# EAGLE board wiseboard3 (EAGLE 8.2.2)

Size 42 x 42 mm. Coordinates in mm from the lower left corner, seen from the top.
Outline: 42,5 42,37 arc90 37,42 5,42 arc90 0,37 0,5 arc90 5,0 37,0 arc90 42,5
Copper layers (1*16): Top 0.035mm / dielectric 1.5mm / Bottom 0.035mm
Design rules "default": minimum track width 6mil, minimum drill 0.35mm, track to track 6mil, track to pad 6mil, pad to pad 6mil, via to via 6mil, smd to smd 6mil, copper to edge 40mil, drill to drill 6mil, minimum pad ring 10mil, minimum via ring 8mil, stop-mask expansion 4mil, vias tented up to drill 0mil, thermal gap 10mil

## Footprints (pad centres in the part's own frame; a part is rotated, then mirrored left to right if it is on the bottom)
587-2103-1-ND = smd 1.5 x 4: P$1 -2.55,0; P$2 2.55,0
CHIP-LED0805 = smd 1.2 x 1.2: A 0,-1.05; C 0,1.05
C0805 = smd 1.3 x 1.5: 1 -0.95,0; 2 0.95,0
SOD-123 = smd 1.2 x 0.7: A 1.85,0; C -1.85,0
DO214AA = smd 1.8 x 2.2: A 2.55,0; C -2.55,0
SOP50P490X110-10N = smd 1.397 x 0.279: 1 -2.184,0.991; 2 -2.184,0.508; 3 -2.184,0; 4 -2.184,-0.508; 5 -2.184,-0.991; 6 2.184,-0.991; 7 2.184,-0.508; 8 2.184,0; 9 2.184,0.508; 10 2.184,0.991
SO08 = smd 0.6 x 2.2: 1 -1.905,-2.6; 2 -0.635,-2.6; 3 0.635,-2.6; 4 1.905,-2.6; 5 1.905,2.6; 6 0.635,2.6; 7 -0.635,2.6; 8 -1.905,2.6
SO8 = smd 0.6 x 2.2: 1 -1.905,-2.6; 2 -0.635,-2.6; 3 0.635,-2.6; 4 1.905,-2.6; 5 1.905,2.6; 6 0.635,2.6; 7 -0.635,2.6; 8 -1.905,2.6
SOT95P280X145-5N = smd 1.1 x 0.6: 1 -1.3,0.95; 2 -1.3,0; 3 -1.3,-0.95; 4 1.3,-0.95; 5 1.3,0.95
DQC10_P84X2P4 = smd 0.66 x 0.305: 1 -1.029,1; 2 -1.029,0.5; 3 -1.029,0; 4 -1.029,-0.5; 5 -1.029,-1; 6 1.029,-1; 7 1.029,-0.5; 8 1.029,0; 9 1.029,0.5; 10 1.029,1 | smd 0.94 x 2.515: 11 0,0
EDGE_CON_2 = smd 1.016 x 3.048: 1 1.27,1.524; 2 -1.27,1.524
EDGE_CON_4 = smd 1.016 x 3.048: 1 2.54,0.254; 2 0,0.254; 3 -5.08,0.254; 4 -2.54,0.254
SOT23 = smd 1 x 1.4: 1 -0.95,-1.306; 2 0.95,-1.306; 3 0,1.306
R0805 = smd 1.3 x 1.5: 1 -0.95,0; 2 0.95,0
KMR2 = smd 1 x 1: 1 2,0.8; 2 2,-0.8; 3 -2,0.8; 4 -2,-0.8
ESP-WROOM-03 = smd 0.9 x 1.5: 1 7.7,9; 2 6.43,9; 3 5.16,9; 4 3.89,9; 5 2.62,9; 6 1.35,9; 7 0.08,9; 8 -1.19,9; 9 -2.46,9; 10 -3.73,9; 11 -5,9; 12 -6.27,9; 13 -7.54,9; 14 -8.81,9; 25 -8.81,-9; 26 -7.54,-9; 27 -6.27,-9; 28 -5,-9; 29 -3.73,-9; 30 -2.46,-9; 31 -1.19,-9; 32 0.08,-9; 33 1.35,-9; 34 2.62,-9; 35 3.89,-9; 36 5.16,-9; 37 6.43,-9; 38 7.7,-9 | smd 1.5 x 0.9: 15 -10.3,5.715; 16 -10.3,4.445; 17 -10.3,3.175; 18 -10.3,1.905; 19 -10.3,0.635; 20 -10.3,-0.635; 21 -10.3,-1.905; 22 -10.3,-3.175; 23 -10.3,-4.445; 24 -10.3,-5.715 | smd 6 x 6: GND 0,0
HFQ339CT-ND = smd 0.4 x 0.95: GND@1 6.6,-0.925; GND@2 -6,-0.925 | smd 0.3 x 0.8: P$1 -5.4,-1.2; P$3 -4.8,-1.2; P$5 -4.2,-1.2; P$7 -3.6,-1.2; P$9 -3,-1.2; P$11 -2.4,-1.2; P$13 -1.8,-1.2; P$15 -1.2,-1.2; P$17 -0.6,-1.2; P$19 0,-1.2; P$21 0.6,-1.2; P$23 1.2,-1.2; P$25 1.8,-1.2; P$27 2.4,-1.2; P$29 3,-1.2; P$31 3.6,-1.2; P$33 4.2,-1.2; P$35 4.8,-1.2; P$37 5.4,-1.2; P$39 6,-1.2 | smd 0.3 x 0.65: P$2 -5.1,0.838; P$4 -4.5,0.838; P$6 -3.9,0.838; P$8 -3.3,0.838; P$10 -2.7,0.838; P$12 -2.1,0.838; P$14 -1.5,0.838; P$16 -0.9,0.838; P$18 -0.3,0.838; P$20 0.3,0.838; P$22 0.9,0.838; P$24 1.5,0.838; P$26 2.1,0.838; P$28 2.7,0.838; P$30 3.3,0.838; P$32 3.9,0.838; P$34 4.5,0.838; P$36 5.1,0.838; P$38 5.7,0.838
TRIM_TC33X-2-103E = smd 1.2 x 1.2: 1 -1.8,1; 3 -1.8,-1 | smd 1.5 x 1.6: 2 1.45,0

## Placement (x,y rotation side)
22  587-2103-1-ND  [587-2103-1-ND]  13,31 180 top
BOOT  LED1  [CHIP-LED0805]  40,35.5 270 top
C1  1uF  [C0805]  7,35 90 top
C2  1uF  [C0805]  19.5,22 0 top
C3  1uF  [C0805]  18,26 90 top
C4  10uF  [C0805]  33,25 270 top
C5  10uF  [C0805]  33,30 270 top
C6  1uF  [C0805]  8,19 270 top
C8  10uF  [C0805]  39,16 0 top
C10  10uF  [C0805]  18,30 90 top
CHRG/LBO  LED3  [CHIP-LED0805]  40,5 90 top
D1  MBR120VLSFT1G  [SOD-123]  40,25 90 top
D2  MBR120  [SOD-123]  13,35 180 top
D3  1n4148  [SOD-123]  35.5,30 270 top
D4  SS24  [DO214AA]  23,25 0 top
D5  SS24  [DO214AA]  23,28 0 top
D6  SS24  [DO214AA]  23,31 180 top
DONE  LED4  [CHIP-LED0805]  40,9 270 top
IC1  LT1945  [SOP50P490X110-10N]  8,29 90 top
IC2  LM358  [SO08]  3,35.5 180 top
IC3  L79L15  [SO8]  3,27.5 180 top
IC4  L78L15  [SO8]  3,19.5 180 top
IC5  W25Q  [SO8]  34,14 180 top
IC8  IC6  [SOT95P280X145-5N]  25,34 180 top
IC9  BQ24210DQCT  [DQC10_P84X2P4]  39,13 270 top
J1  BAT_CON  [EDGE_CON_2]  10,42 180 top
J2  SOL_CON  [EDGE_CON_2]  42,31 90 top
J3  PROG_HEADER  [EDGE_CON_4]  32.25,40.75 180 top
J4  BUT_CON  [EDGE_CON_2]  36,0 0 top
POWERGOOD  LED2  [CHIP-LED0805]  40,7 90 top
Q1  IRLM  [SOT23]  12.5,21.5 270 top
R1  10K  [R0805]  32,7 270 top
R2  10k  [R0805]  29,22 0 top
R3  470k  [R0805]  29,26 0 top
R4  39k  [R0805]  29,24 180 top
R5  39k  [R0805]  9,35 90 top
R6  560k  [R0805]  29,31 180 top
R7  39k  [R0805]  29,29 0 top
R8  39k  [R0805]  8,23 270 top
R9  200k  [R0805]  24,22 0 top
R10  1K  [R0805]  36,7 180 top
R13  1K  [R0805]  36,9 180 top
R14  1K  [R0805]  36,5 180 top
R15  10K  [R0805]  32,3 90 top
R17  10K  [R0805]  33,19 180 top
R18  10K  [R0805]  33,21 0 top
R21  10K  [R0805]  37,24 0 top
R22  10K  [R0805]  29,34 180 top
R23  1K  [R0805]  37,26 0 top
R36  790  [R0805]  40,20 270 top
R37  10k  [R0805]  38,20 270 top
R38  7.6k  [R0805]  36,20 90 top
SW1  SPST_TACT-KMR2  [KMR2]  24,40 0 top
SW2  SPST_TACT-KMR2  [KMR2]  17,40 0 top
U3  ESP-WROOM-03  [ESP-WROOM-03]  20.5,9 270 top
U$4  FH26W-39S  [HFQ339CT-ND]  3,9 270 top
U$5  587-2103-1-ND  [587-2103-1-ND]  13,26 180 top
VR1  TC33X-104ECT-ND  [TRIM_TC33X-2-103E]  19.5,34.5 180 top

## Library data of the parts
22 D4-D6 IC3-IC5 IC8 J1-J4 U$4 U$5 = WISE
BOOT CHRG/LBO D2 D3 DONE POWERGOOD SW1 SW2 = adafruit
C1-C6 C8 C10 R1-R10 R13-R15 R17 R18 R21-R23 R36-R38 = resistor
D1 = microbuilder
IC1 = LTC_By_element14_Batch_1; MPN: LT1945EMS#PBF; OC_FARNELL: 1273495; OC_NEWARK: 57M7266; PACKAGE: MSOP-10; SUPPLIER: Linear Technology
IC2 = linear
IC9 = WISE; MANUFACTURER_PART_NUMBER: BQ24210DQCT; VENDOR: Vendor
Q1 = IRLML6402; AVAILABILITY: Unavailable; DESCRIPTION: MOSFETs, Semiconductors and Actives, mosfet, Transistors, Discretes (diodes, transistors, thyristors ...); MF: International Rectifier; MP: IRLML6402; PACKAGE: SOT-23-3 International Rectifier; PRICE: None
U3 = esp32
VR1 = WISE; AVAILABILITY: Good; DESCRIPTION: Res%20Trimmer%2010K%20Ohm%2025%25%200.1W%281/10W%29%201%28Elec%29/1%28Mech%29Turn%20%283%20X%203.8mm%29%20Foot%20Print%20SMD%20Embossed%20T/R; MF: Bourns; MP: TC33X-2-103E; PACKAGE: None; PRICE: 0.16 USD

## Nets
+3V3: BOOT.A IC5.3 IC5.8 IC8.5 R21.2 U3.2 U3.3 U$4.P$4 U$4.P$8 U$4.P$10 U$4.P$29 U$4.P$30 U$4.P$35 U$4.P$36
+15V: C6.1 IC4.1 R8.2 U$4.P$2
+22V: C5.1 D6.C IC4.8 R6.2 U$4.P$23
-15V: C1.1 IC3.1 R5.1 R9.1 U$4.P$1
-20V: C4.1 D5.A IC3.2 IC3.3 IC3.6 IC3.7 R3.2 U$4.P$24
BAT_SENS: R1.1 R15.2 U3.4
BUT_CON: J4.1 U3.8
CKV: U3.37 U$4.P$33 U$4.P$38
CL: U3.23 U$4.P$5
CLK: IC5.6 U3.20
D0: U3.26 U$4.P$12
D1: U3.27 U$4.P$13
D2: U3.13 U$4.P$14
D3: U3.28 U$4.P$15
D4: U3.12 U$4.P$16
D5: U3.29 U$4.P$17
D6: U3.30 U$4.P$18
D7: U3.31 U$4.P$19
ESP_DI: IC5.2 U3.22
ESP_DO: IC5.5 U3.21
FB2: C5.2 IC1.5 R6.1 R7.2
GMODE: U$4.P$27 U$4.P$28
GND: C1.2 C2.2 C6.2 C8.1 C10.1 D4.C DONE.C IC1.3 IC1.7 IC1.9 IC3.5 IC4.2 IC4.3 IC4.6 IC4.7 IC5.4 IC8.2 IC9.3 IC9.7 IC9.11 J1.2 J2.2 J3.4 J4.2 R4.1 R5.2 R7.1 R8.1 R15.1 R18.1 R36.1 R37.1 SW1.1 SW1.3 SW2.1 SW2.3 U3.1 U3.15 U3.38 U3.GND U$4.GND@1 U$4.GND@2 U$4.P$3 U$4.P$9 U$4.P$31 U$4.P$34 VR1.3
GPIO0: R23.1 SW1.2 SW1.4
IC5: IC5.1 U3.19
LE: U3.16 U$4.P$6
N$1: IC2.3 VR1.2
N$2: 22.P$2 C3.1 IC1.10
N$3: C8.2 D1.C IC9.1
N$4: 22.P$1 C2.1 IC1.8 Q1.3 U$5.P$2
N$5: D6.A IC1.6 U$5.P$1
N$6: C3.2 D4.A D5.C
N$7: U3.25
N$8: R9.2 VR1.1
N$9: IC9.6 R10.2
N$10: CHRG/LBO.C R14.1
N$11: POWERGOOD.C R10.1
N$14: DONE.A R13.1
N$15: IC9.8 R13.2 R14.2
N$17: IC9.2 R36.2
N$22: BOOT.C R23.2
N$23: IC8.3 R22.2
N$28: IC9.5 R37.2 R38.1
N$30: IC9.4 R38.2
N$37: U3.14
N$48: U3.6
N$49: U3.7
NEGEN: IC1.2 U3.9
NFB1: C4.2 IC1.1 R3.1 R4.2
OE: U3.24 U$4.P$7
PANEL: D1.A J2.1 R17.2
PANEL_SENS: R17.1 R18.2 U3.5
POSEN: IC1.4 U3.10
RESET: R21.1 SW2.2 SW2.4
RXD: D3.A U3.34
RXD_5V: D3.C J3.2
SPH: U3.33 U$4.P$11
SPV: U3.36 U$4.P$32 U$4.P$37
SUP_CTRL: Q1.1 R2.2 U3.11
TXD: J3.1 U3.35
V+: IC2.8
V-: IC2.4
VBAT: C10.2 CHRG/LBO.A D2.A IC9.10 J1.1 POWERGOOD.A Q1.2 R1.2 R2.1
VCC: D2.C IC8.1 J3.3 R22.1
VCOMMON: IC2.1 IC2.2 U$4.P$22

## Tracks (layer width: path | path; a pad name or v marks a point on that pad's centre or on a via)
+3V3  (13 unrouted)
+15V  (3 unrouted)
+22V  (4 unrouted)
-15V  (4 unrouted)
-20V  (7 unrouted)
BAT_SENS  (2 unrouted)
BUT_CON  (1 unrouted)
CKV  (2 unrouted)
CL  (1 unrouted)
CLK  (1 unrouted)
D0  (1 unrouted)
D1  (1 unrouted)
D2  (1 unrouted)
D3  (1 unrouted)
D4  (1 unrouted)
D5  (1 unrouted)
D6  (1 unrouted)
D7  (1 unrouted)
ESP_DI  (1 unrouted)
ESP_DO  (1 unrouted)
FB2  (3 unrouted)
GMODE  (1 unrouted)
GND  (46 unrouted)
GPIO0  (2 unrouted)
IC5  (1 unrouted)
LE  (1 unrouted)
N$1  (1 unrouted)
N$2  (2 unrouted)
N$3  (2 unrouted)
N$4  (4 unrouted)
N$5  (2 unrouted)
N$6  (2 unrouted)
N$8  (1 unrouted)
N$9  (1 unrouted)
N$10  (1 unrouted)
N$11  (1 unrouted)
N$14  (1 unrouted)
N$15  (2 unrouted)
N$17  (1 unrouted)
N$22  (1 unrouted)
N$23  (1 unrouted)
N$28  (2 unrouted)
N$30  (1 unrouted)
NEGEN  (1 unrouted)
NFB1  (3 unrouted)
OE  (1 unrouted)
PANEL  (2 unrouted)
PANEL_SENS  (2 unrouted)
POSEN  (1 unrouted)
RESET  (2 unrouted)
RXD  (1 unrouted)
RXD_5V  (1 unrouted)
SPH  (1 unrouted)
SPV  (2 unrouted)
SUP_CTRL  (2 unrouted)
TXD  (1 unrouted)
VBAT  (8 unrouted)
VCC  (3 unrouted)
VCOMMON  (2 unrouted)

## Text on the board
tPlace: T | R | BAT | RST | GPIO0 | - | + | SOL | *